# Altium PCB 30-1000.PcbDoc
Units mil, origin at the board's own origin, x right, y up, seen from the top; angles counter-clockwise.
Board outline 5157.48 x 11496.06 mil, 2 copper layers (Top Layer, Top, Bottom Layer, Bottom); 74 components, 41 nets, 177 pads, 241 vias.
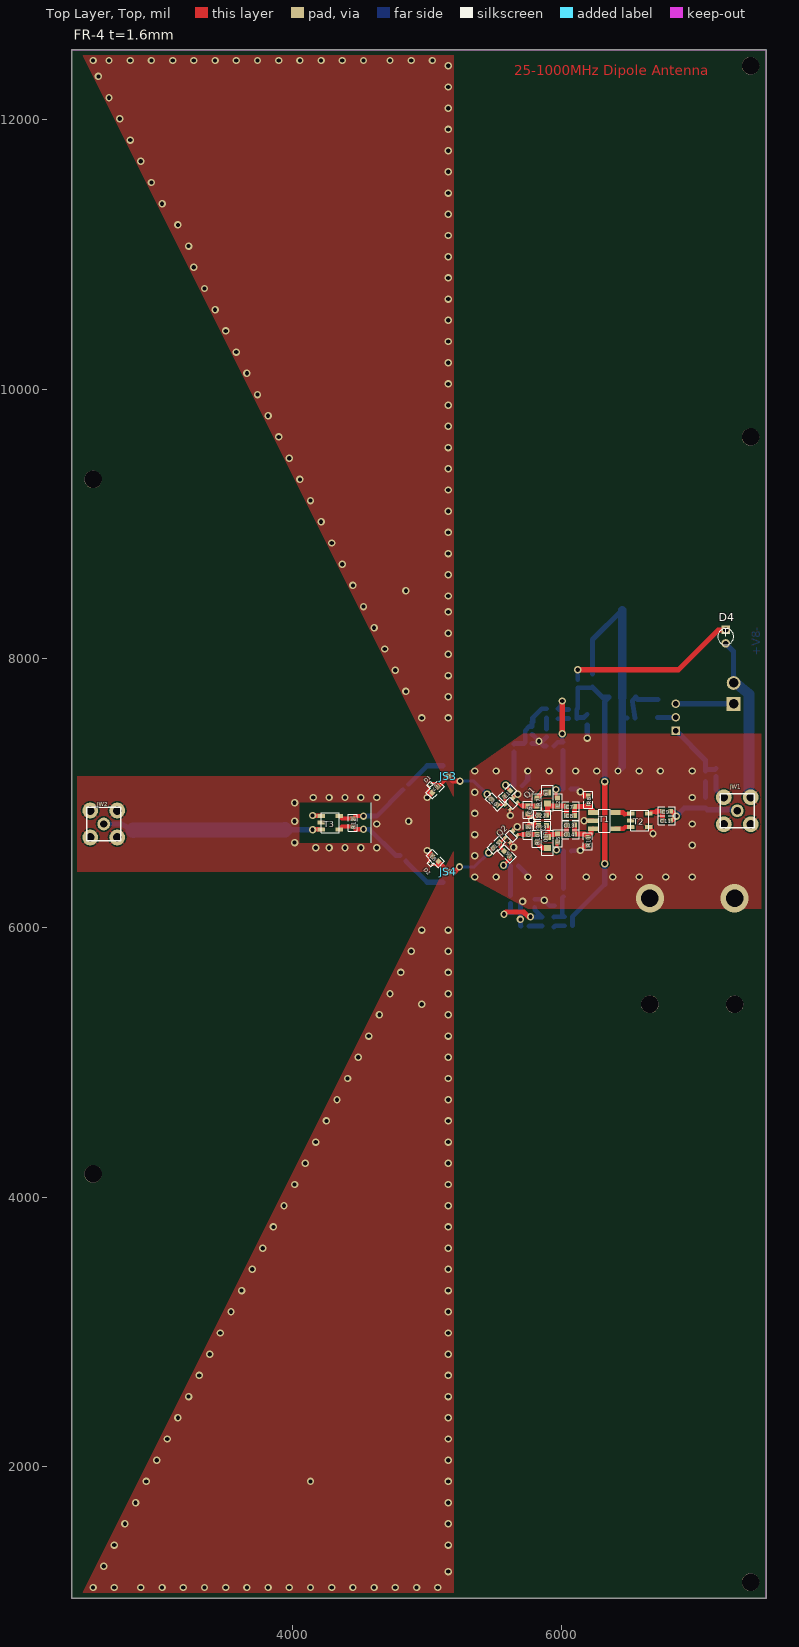
[diagram p0: Top Layer, Top view]
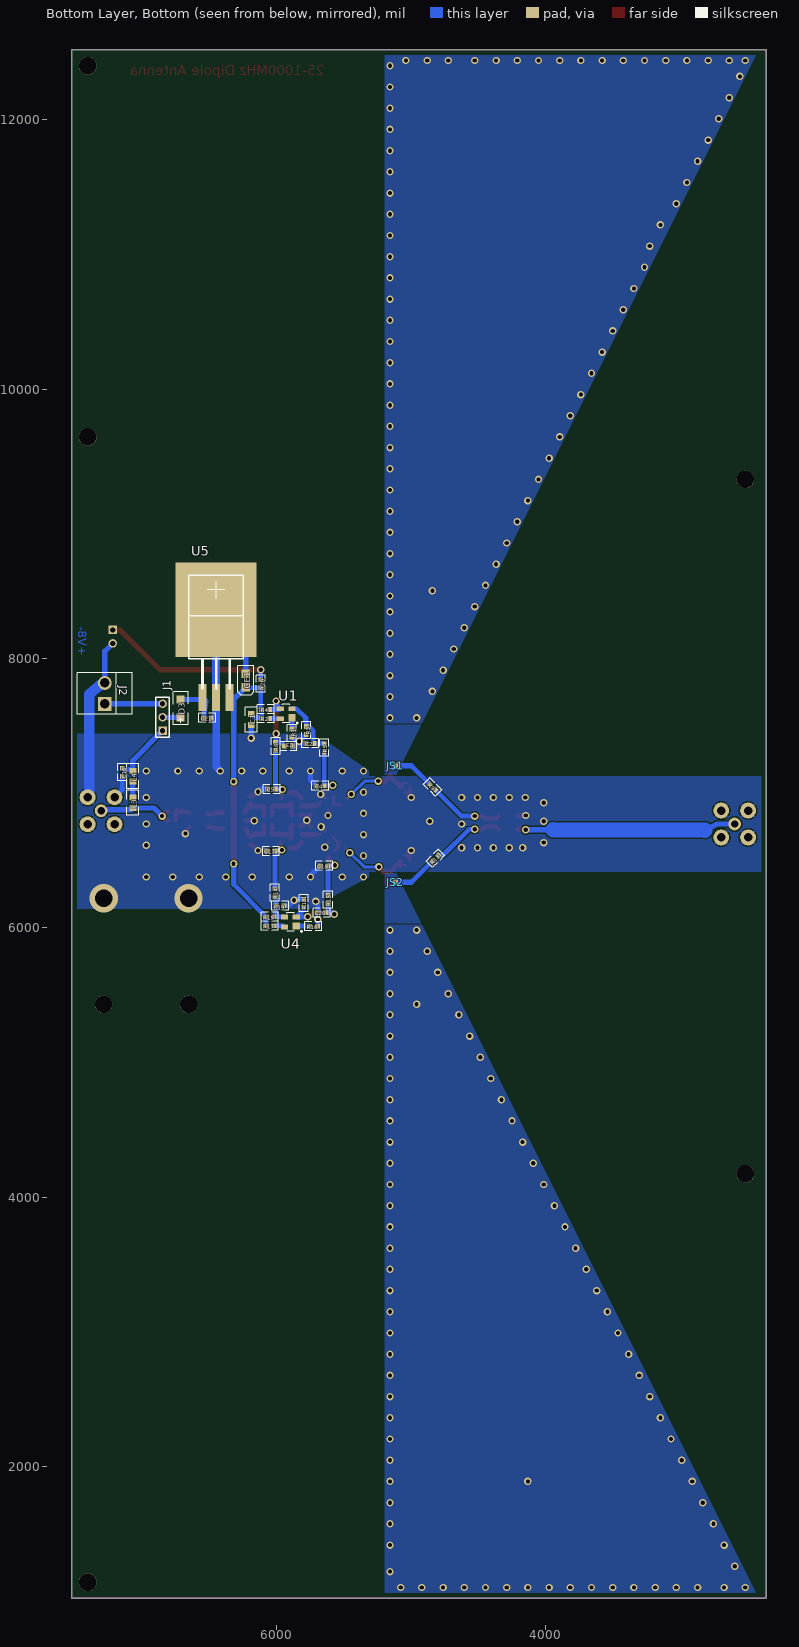
[diagram p1: Bottom Layer, Bottom view, seen from below]

## Layer stack, top to bottom
Top Solder, Top Mask: solder mask 0.4, Solder Resist, Dk 3.5
Top Layer, Top: signal copper 1.4
Dielectric 1: dielectric 12.6, FR-4, Dk 4.8
Bottom Layer, Bottom: signal copper 1.4
Bottom Solder, Bot Mask: solder mask 0.4, Solder Resist, Dk 3.5

## Board outline
2362.2,1023.62 7519.69,1023.62 7519.69,12519.68 2362.2,12519.68

## Design rules (kind name [scope] priority, off if disabled: settings)
Clearance [All] p1: gap=10 ignorepadtopadclearanceinfootprint=FALSE except(0: Arc-Hole Track-Hole SMDPad-Hole THPad-Hole Via-Hole Fill-Hole Poly-Hole Region-Hole Text-Hole; 7.87: Arc-Arc Arc-Track Arc-THPad Arc-Via Track-Track Track-THPad Track-Via THPad-THPad THPad-Via Via-Via)
PlaneClearance [All] p1: clearance=10
PolygonConnect PolygonConnect_16 [IsPolygon And InNet('GND') And OnLayer('Bottom Layer, Bottom') vs IsVia] p1: connectstyle=Direct reliefconductorwidth=15 reliefentries=4 polygonreliefangle="90 Angle" airgapwidth=10
PolygonConnect PolygonConnect_15 [IsPolygon And InNet('GND') And OnLayer('Bottom Layer, Bottom') vs IsPad] p2: connectstyle=Relief reliefconductorwidth=15 reliefentries=4 polygonreliefangle="45 Angle" airgapwidth=10
PolygonConnect PolygonConnect_14 [IsPolygon And InNet('W1') And OnLayer('Bottom Layer, Bottom') vs IsVia] p3: connectstyle=Direct reliefconductorwidth=15 reliefentries=4 polygonreliefangle="90 Angle" airgapwidth=10
PolygonConnect PolygonConnect_13 [IsPolygon And InNet('W1') And OnLayer('Bottom Layer, Bottom') vs IsPad] p4: connectstyle=Direct reliefconductorwidth=15 reliefentries=4 polygonreliefangle="90 Angle" airgapwidth=10
PolygonConnect PolygonConnect_12 [IsPolygon And InNet('W2') And OnLayer('Bottom Layer, Bottom') vs IsVia] p5: connectstyle=Direct reliefconductorwidth=15 reliefentries=4 polygonreliefangle="90 Angle" airgapwidth=10
PolygonConnect PolygonConnect_11 [IsPolygon And InNet('W2') And OnLayer('Bottom Layer, Bottom') vs IsPad] p6: connectstyle=Relief reliefconductorwidth=15 reliefentries=4 polygonreliefangle="45 Angle" airgapwidth=10
PolygonConnect PolygonConnect_10 [IsPolygon And InNet('TS1') And OnLayer('Bottom Layer, Bottom') vs IsVia] p7: connectstyle=Direct reliefconductorwidth=15 reliefentries=4 polygonreliefangle="90 Angle" airgapwidth=10
PolygonConnect PolygonConnect_9 [IsPolygon And InNet('TS1') And OnLayer('Bottom Layer, Bottom') vs IsPad] p8: connectstyle=Direct reliefconductorwidth=15 reliefentries=4 polygonreliefangle="90 Angle" airgapwidth=10
PolygonConnect PolygonConnect_8 [IsPolygon And InNet('TS2') And OnLayer('Bottom Layer, Bottom') vs IsVia] p9: connectstyle=Direct reliefconductorwidth=15 reliefentries=4 polygonreliefangle="90 Angle" airgapwidth=10
PolygonConnect PolygonConnect_7 [IsPolygon And InNet('TS2') And OnLayer('Bottom Layer, Bottom') vs IsPad] p10: connectstyle=Direct reliefconductorwidth=15 reliefentries=4 polygonreliefangle="90 Angle" airgapwidth=10
PolygonConnect PolygonConnect_6 [IsPolygon And InNet('W2') And OnLayer('Top Layer, Top') vs IsVia] p11: connectstyle=Direct reliefconductorwidth=15 reliefentries=4 polygonreliefangle="90 Angle" airgapwidth=10
PolygonConnect PolygonConnect_5 [IsPolygon And InNet('W2') And OnLayer('Top Layer, Top') vs IsPad] p12: connectstyle=Direct reliefconductorwidth=15 reliefentries=4 polygonreliefangle="90 Angle" airgapwidth=10
PolygonConnect PolygonConnect_4 [IsPolygon And InNet('W1') And OnLayer('Top Layer, Top') vs IsVia] p13: connectstyle=Direct reliefconductorwidth=15 reliefentries=4 polygonreliefangle="90 Angle" airgapwidth=10
PolygonConnect PolygonConnect_3 [IsPolygon And InNet('W1') And OnLayer('Top Layer, Top') vs IsPad] p14: connectstyle=Direct reliefconductorwidth=15 reliefentries=4 polygonreliefangle="90 Angle" airgapwidth=10
PolygonConnect PolygonConnect_2 [IsPolygon And InNet('GND') And OnLayer('Top Layer, Top') vs IsVia] p15: connectstyle=Direct reliefconductorwidth=15 reliefentries=4 polygonreliefangle="90 Angle" airgapwidth=10
PolygonConnect PolygonConnect_1 [IsPolygon And InNet('GND') And OnLayer('Top Layer, Top') vs IsPad] p16: connectstyle=Relief reliefconductorwidth=15 reliefentries=4 polygonreliefangle="45 Angle" airgapwidth=10
PolygonConnect [All] p17: connectstyle=Relief reliefconductorwidth=10 reliefentries=4 polygonreliefangle="90 Angle" airgapwidth=10
RoutingVias [All] p1: holewidth=28 width=50 viastyle="Through Hole" minholewidth=28 minwidth=50 maxholewidth=28 maxwidth=50
SolderMaskExpansion [All] p1: expansion=4
Width [All] p1: maxlimit=10 minlimit=10 preferedwidth=10
29 further rules are at their usual default settings.

## Components (designator, comment, footprint, x,y, rotation, side; value= is the part's Value field where it differs from the comment)
C1 "" SMD-0805 6188.98,7547.24 r90 bottom
C2 "" SMD-0603 5779.53,7370.08 r180 bottom
C3 "" SMD-0603 5881.89,7350.39 r0 bottom
C4 "" SMD-0603 5704.72,7055.12 r180 bottom
C5 "" SMD-0603 6066.93,7031.5 r180 bottom
C6 "" SMD-0603 5748.03,6905.51 r270 top
C7 "" SMD-0603 6035.43,6901.57 r0 top
C8 "" SMD-0603 6035.43,6834.65 r0 top
C9 "" SMD-0603 6748.03,6866.14 r0 top
C10 "" SMD-0603 5480.31,6956.69 r315 top
C11 "" SMD-0603 6748.03,6799.21 r0 top
C12 "" SMD-0603 5748.03,6692.91 r90 top
C13 "" SMD-0603 6035.43,6763.78 r0 top
C14 "" SMD-0603 6035.43,6696.85 r0 top
C15 "" SMD-0603 5492.13,6594.49 r45 top
C16 "" SMD-0603 7145.67,7185.04 r270 bottom
C17 "" SMD-0603 6070.87,6570.87 r180 bottom
C18 "" SMD-0603 5677.17,6460.63 r180 bottom
C19 "" SMD-0603 5944.88,6165.35 r0 bottom
C20 "" SMD-0603 5692.91,6114.17 r180 bottom
C21 "" SMD-0603 6543.31,7559.06 r180 bottom
C22 "" SMD-0603 5826.77,6838.58 r0 top
C23 "" SMD-0603 5885.83,6759.84 r180 top
CE1 "" SMD-A 6228.35,7787.4 r90 bottom
D1 "" TSLP-2-17 5031.5,7074.8 r225 top
D2 "" TSLP-2-17 5011.81,6488.19 r315 top
D3 "" SOD80C 6712.6,7629.92 r90 bottom
D4 "" LED3MM 7216.54,8212.6 r270 top
J1 "" PLS-3 6846.46,7464.57 r90 bottom
J2 "" PWL-2 7275.59,7818.9 r0 bottom
JS1 "" PAD1X1MM 5118.11,7204.72 r90 bottom
JS2 "" PAD1X1MM 5118.11,6338.58 r90 bottom
JS3 "" PAD1X1MM 5157.48,7125.98 r90 top
JS4 "" PAD1X1MM 5157.48,6417.32 r90 top
JW1 "" SMA-V 7303.15,6870.08 r90 top
JW2 "" SMA-V 2598.43,6771.65 r90 top
L1 "" SMD-0603 5574.8,6976.38 r45 top
L2 "" SMD-0603 5968.5,6905.51 r90 top
L3 "" SMD-0805 7066.93,6929.13 r270 bottom
L4 "" SMD-0805 7066.93,7125.98 r270 bottom
L5 "" SMD-0603 5968.5,6637.8 r90 top
L6 "" SMD-0603 5614.17,6527.56 r135 top
L7 "" SMD-0603 5078.74,7047.24 r225 top
L8 "" SMD-0603 5039.37,6535.43 r315 top
L9 "" SMD-0805 5893.7,6964.57 r90 top
L10 "" SMD-0805 5893.7,6633.86 r90 top
Q1 "" SOT-343 5637.8,6964.57 r45 top
Q2 "" SOT-343 5637.8,6720.47 r45 top
R1 "" SMD-0603 5885.83,7476.38 r270 bottom
R2 "" SMD-0603 6110.24,7555.12 r180 bottom
R3 "" SMD-0603 5779.53,7496.06 r270 bottom
R4 "" SMD-0603 6110.24,7622.05 r180 bottom
R5 "" SMD-0603 5645.67,7307.09 r90 bottom
R6 "" SMD-0603 6007.87,7318.9 r90 bottom
R7 "" SMD-0603 5814.96,6964.57 r270 top
R8 "" SMD-0603 6196.85,6921.26 r90 top
R9 "" SMD-0603 4862.2,7066.93 r225 bottom
R10 "" SMD-0603 5814.96,6633.86 r90 top
R11 "" SMD-0603 6192.91,6614.17 r90 top
R12 "" SMD-0603 4448.82,6751.97 r90 top
R13 "" SMD-0603 4842.52,6496.06 r135 bottom
R14 "" SMD-0603 6011.81,6232.28 r90 bottom
R15 "" SMD-0603 5618.11,6181.1 r90 bottom
R16 "" SMD-0603 5755.91,6011.81 r180 bottom
R17 "" SMD-0603 6078.74,6015.75 r180 bottom
R18 "" SMD-0603 5799.21,6153.54 r90 bottom
R19 "" SMD-0603 6078.74,6082.68 r180 bottom
R20 "" SMD-0603 6118.11,7842.52 r270 bottom
T1 "" SM-138 6232.28,6736.22 r90 top
T2 "" SM-22 6511.81,6748.03 r90 top
T3 "" SM-22 4212.6,6732.28 r90 top
U1 "" SOT143 5929.13,7590.55 r90 bottom
U4 "" SOT143 5897.64,6043.31 r90 bottom
U5 "" TO-220-SMD 6448.82,8511.81 r180 bottom

## Footprints (in the part's own frame and the unit in brackets; to place one, negate y for a bottom-side part, rotate by r counter-clockwise, add the part's x,y. Pads: shape width x height; smd on the part's side, far side on the other; paste and mask are expansions set on the pad)
LED3MM [mm]
  rect 1.6x1.6 hole 1: 1(0,0)
  round 1.6 hole 1: 2(2.54,0)
  silkscreen extent -0.25,-1.52 2.79,1.52
PAD1X1MM [mm]
  rect 1x1 smd: 1(0,0)
PLS-3 [mm]
  rect 1.6x1.6 hole 1: 1(0,0)
  round 1.6 hole 1: 2(2.54,0) 3(5.08,0)
  silkscreen extent -1.27,-1.27 6.35,1.27
PWL-2 [mm]
  rect 2.6x2.6 hole 1.8: 1(0,3.96)
  round 2.6 hole 1.8: 2(0,0)
  silkscreen extent -5.2,-1.9 5.2,5.9
SM-22 [mm]
  rect 0.76x1.4 smd: 1(0,0) 2(1.27,0) 3(2.54,0) 4(2.54,-3.43) 5(0,-3.43)
  silkscreen extent -0.65,-3.4 3.15,0
SM-138 [mil]
  rect 36x75 smd: 1(0,0) 2(60,0) 3(120,0) 4(120,-166) 5(0,-166)
  silkscreen extent -24,-123 144,-43
SMA-V [mm]
  round 2.4 hole 1.4: 1(0,0)
  round 3 hole 1.6: 2(-2.54,-2.54) 3(2.54,-2.54) 4(2.54,2.54) 5(-2.54,2.54)
  silkscreen extent -3.18,-3.18 3.18,3.18
SMD-0603 [mm]
  rect 0.9x0.9 smd: 1(0,0) 2(1.5,0)
  silkscreen extent -0.85,-0.85 2.35,0.85
SMD-0805 [mil]
  rect 45x50 smd: 1(-40,0) 2(40,0)
  silkscreen extent -93,-44 93,44
SMD-A [mil]
  rect 65x65 smd: 1(0,0) 2(100,0)
  silkscreen extent -60,-60 160,60
SOD80C [mil]
  rect 60x60 smd: 1(-66.93,0) 2(66.93,0)
  silkscreen extent -122,-55 122,55
SOT143 [mm]
  rect 1.35x1.35 smd: 1(-0.75,-1.1)
  rect 0.9x1.35 smd: 2(0.95,-1.1) 3(0.95,1.1) 4(-0.95,1.1)
  silkscreen extent -1.87,-2.22 1.75,0.7
SOT-343 [mm]
  rect 0.65x0.55 smd: 1(-1.95,0.15) 2(-1.95,-1.15) 3(0,-1.15)
  rect 0.65x0.85 smd: 4(0,0)
  silkscreen extent -1.55,-1.5 -0.35,0.5
TO-220-SMD [mil]
  rect 60x200 smd: 1(-100,-800) 2(0,-800) 3(100,-800)
  rect 600x700 smd: 4(0,-150)
  silkscreen extent -202,-737 202,105
TSLP-2-17 [mm]
  rect 0.4x0.4 smd: 1(0,0) 2(0.8,0)
  silkscreen extent -0.1,-0.35 0.9,0.35

## Free pads (board coordinates)
  round 129.92 hole 129.92 unplated: 0(2519.68,4173.23) 0(2519.68,9330.71) 0(6653.54,5433.07) 0(7283.46,5433.07) 0(7401.57,1141.73) 0(7401.57,9645.67) 0(7401.57,12401.57)

## Via types
v1: diameter 55.12, hole 31.5, Top Layer, Top to Bottom Layer, Bottom, 239 vias
v2: diameter 208.66, hole 129.92, Top Layer, Top to Bottom Layer, Bottom, 2 vias

## Nets (pads, with @x,y where several pads share a name; then routed paths per layer and width w, separated by ;. In a path a pad name is that pad's centre, name@x,y a point inside that pad or via, vN(x,y) a via of type N, cw(c..) or ccw(c..) an arc to the next point about the centre after c; other vN are vias at no path point)
+5V: C1.2 CE1.1 R2.1 R4.1 R17.1 R19.1 R20.2 U5.3 | length 2395.2
  Top Layer, Top w39.37: v1(6318.9,6476.38) v1(6318.9,7086.61)
  Bottom Layer, Bottom w35.43: R17.1 R19.1 6318.9,6322.83 ; C1.2 6164.72,7562.99 6118.11,7562.99 R2.1 R4.1 6118.11,7629.92 R20.2 6224.41,7783.46 CE1.1
  Bottom Layer, Bottom w39.37: CE1.1 6303.94,7711.81 U5.3 6318.9,7681.89 v1(6318.9,7086.61) ; 6318.9,6322.83 v1(6318.9,6476.38)
+VIN: J1.3 J2.1 | length 429.8
  Bottom Layer, Bottom w39.37: J1.3 7274.02,7664.57 J2.1
GND: C1.1 C2.1 C3.1 C4.1 C5.1 C6.2 C12.2 C16.2 C17.1 C18.1 C19.1 C20.1 C21.2 C22.1 C23.2 CE1.2 D1.2 D2.1 D4.2 J2.2 JW1.2 JW1.3 JW1.4 JW1.5 JW2.2 JW2.3 JW2.4 JW2.5 L7.2 L8.1 Q1.2 Q1.4 Q2.2 Q2.4 R1.2 R3.2 R8.2 R11.1 R16.2 R18.2 T1.2 T2.5 T3.3 U5.2 U5.4 | length 5346.8
  Top Layer, Top w15.75: 5009.23,7006.52 D1.2 ; D2.1 5011.81,6535.43
  Top Layer, Top w21.65: Q2.2 v1@5641.73,6607.96 ; v1@5615.52,6837.23 Q1.2
  Top Layer, Top w23.62: v1(4149.61,6834.65) v1@4151.97,6832.28 ; v1@5615.52,6837.23 v1(5618.11,6834.65) ; Q2.4 v1(5669.29,6751.97) ; Q1.4 5649.61,6976.38 v1(5673.23,6992.13) ; v1(5641.73,6598.43) v1@5641.73,6607.96
  Top Layer, Top w29.92: T2.5 6677.17,6717.72 v1(6677.17,6700.79)
  Top Layer, Top w31.5: v1@4151.97,6832.28 T3.3
  Top Layer, Top w35.43: v1(5000,6574.8) 5025.59,6549.21 L8.1 ; v1(5000,6968.5) 5023.62,6992.13 L7.2 ; C12.2 v1(5775.59,6799.21) ; C6.2 v1(5775.59,6799.21) ; C23.2 5799.21,6759.84 v1(5775.59,6799.21) ; C22.1 5799.21,6838.58 v1(5775.59,6799.21) ; v1(6137.8,6574.8) 6177.17,6614.17 R11.1 ; v1(6137.8,7011.81) 6169.29,6980.31 R8.2
  Top Layer, Top w36: v1@6166.3,6796.22 T1.2
  Top Layer, Top w39.37: 5009.23,7006.52 5023.62,6992.13 ; 5011.81,6535.43 5025.59,6549.21 ; v1(6165.35,6795.28) v1@6166.3,6796.22
  Bottom Layer, Bottom w35.43: C18.1 v1@5748.03,6389.76 ; v1@5692.91,6181.1 C20.1 v1(5692.91,6062.99) 5692.91,6015.75 R16.2 ; C4.1 5748.03,7098.43 ; C2.1 5814.96,7370.08 v1(5830.71,7385.83) ; R3.2 v1(5830.71,7385.83) ; R18.2 v1@5862.2,6212.6 ; v1(5870.08,6204.72) 5909.45,6165.35 C19.1 ; C3.1 5866.14,7350.39 v1(5830.71,7385.83) ; R1.2 5854.33,7385.83 v1(5830.71,7385.83) ; C5.1 6118.11,7031.5 ; C17.1 v1@6133.86,6578.74 ; 6448.82,7574.8 C21.2 ; 7145.67,7027.56 C16.2
  Bottom Layer, Bottom w39.37: v1@5692.91,6181.1 v1(5708.66,6196.85) ; v1(5748.03,6377.95) v1@5748.03,6389.76 ; 5748.03,7098.43 v1(5748.03,7165.35) ; v1@5862.2,6212.6 v1(5870.08,6204.72) ; 6118.11,7031.5 v1(6137.8,7011.81) ; v1@6133.86,6578.74 v1(6137.8,6574.8) ; v1(6188.98,7409.45) C1.1 ; CE1.2 6228.35,8141.34 U5.4 ; 7145.67,7027.56 JW1.4 ; D4.2 7275.59,8053.54 J2.2
  Bottom Layer, Bottom w55.12: v1(6417.32,7165.35) 6448.82,7196.85 6448.82,7574.8 U5.2
  Bottom Layer, Bottom w60: U5.2 U5.4
  Bottom Layer, Bottom w78.74: J2.2 7291.34,7818.9 7389.76,7736.22 7389.76,6999.21 JW1.3
  other v1: 5354.33,6377.95 5511.81,6377.95 5905.51,6377.95 6181.1,6377.95 6377.95,6377.95 6574.8,6377.95 6771.65,6377.95 6968.5,6377.95 5354.33,6535.43 4173.23,6594.49 4271.65,6594.49 4389.76,6594.49 4507.87,6594.49 4625.98,6594.49 6968.5,6614.17 4015.75,6633.86 5354.33,6692.91 4625.98,6771.65 6968.5,6771.65 4015.75,6791.34 4862.2,6791.34 5354.33,6850.39 4015.75,6929.13 4153.54,6968.5 4271.65,6968.5 4389.76,6968.5 4507.87,6968.5 4625.98,6968.5 6968.5,6968.5 5354.33,7007.87 5354.33,7165.35 5511.81,7165.35 5905.51,7165.35 6102.36,7165.35 6259.84,7165.35 6574.8,7165.35 6732.28,7165.35 6968.5,7165.35
  other v2: 6653.54,6220.47 7283.46,6220.47
N045200: D4.1 R20.1 | length 1295.5
  Top Layer, Top w39.37: v1(6118.11,7917.32) 6866.14,7917.32 7161.42,8212.6 D4.1
  Bottom Layer, Bottom w35.43: R20.1 v1(6118.11,7917.32)
N3475576: C9.1 C11.1 T2.4 | length 175.6
  Top Layer, Top w29.92: T2.4 6661.02,6862.2 6700.79,6862.2
  Top Layer, Top w35.43: 6704.72,6866.14 C9.1 C11.1
  Top Layer, Top w39.37: 6700.79,6862.2 6704.72,6866.14
N3475764: C16.1 J1.1 L4.1 | length 476.5
  Bottom Layer, Bottom w35.43: L4.1 7078.11,7177.17 7137.8,7177.17 C16.1
  Bottom Layer, Bottom w39.37: J1.1 7066.93,7244.09 L4.1
N3478305: D3.1 J1.2 | length 134.5
  Bottom Layer, Bottom w39.37: D3.1 6844.88,7562.99 J1.2
N3478433: C21.1 D3.2 U5.1 | length 334.7
  Bottom Layer, Bottom w35.43: C21.1 6523.62,7686.61 U5.1
  Bottom Layer, Bottom w39.37: U5.1 6563.78,7696.85 D3.2
N3479247: T1.5 T2.1 | length 118.4
  Top Layer, Top w29.92: 6456.69,6736.22 6468.5,6748.03 T2.1
  Top Layer, Top w36: T1.5 6456.69,6736.22
N3479295: T1.4 T2.3 | length 118.2
  Top Layer, Top w29.92: 6464.57,6846.46 6510.24,6846.46 T2.3
  Top Layer, Top w36: T1.4 6454.8,6856.22 6464.57,6846.46
N3479651: C13.2 C14.2 R11.2 T1.1 | length 254.4
  Top Layer, Top w35.43: C13.2 C14.2 6169.29,6696.85 R11.2 6192.91,6677.17 6216.54,6700.79
  Top Layer, Top w36: 6216.54,6700.79 6216.54,6720.47 T1.1
N3479714: C7.2 C8.2 R8.1 T1.3 | length 257.2
  Top Layer, Top w35.43: C8.2 C7.2 6177.17,6901.57 R8.1 6212.6,6905.51 6212.6,6889.76
  Top Layer, Top w36: 6212.6,6889.76 6232.28,6870.08 T1.3
N3479872: L9.2 R7.1 | length 95.3
  Top Layer, Top w35.43: R7.1 5854.96,7004.57
  Top Layer, Top w39.37: 5854.96,7004.57 L9.2
N3479906: L10.1 R10.1 | length 95.3
  Top Layer, Top w35.43: R10.1 5854.96,6593.86
  Top Layer, Top w39.37: 5854.96,6593.86 L10.1
N3481012: R2.2 U1.4 | length 79.6
  Bottom Layer, Bottom w35.43: U1.4 6013.78,7553.15 6015.75,7555.12 R2.2
N3481043: C3.2 R4.2 R6.2 U1.3 | length 538.4
  Top Layer, Top w39.37: v1(6003.94,7440.94) v1(6003.94,7685.04)
  Bottom Layer, Bottom w35.43: C3.2 5968.5,7377.95 R6.2 6003.94,7381.89 v1(6003.94,7440.94) ; v1(6003.94,7685.04) 6003.94,7659.45 U1.3 5978.35,7622.05 R4.2
N3481716: C6.1 Q1.3 R7.2 | length 156.4
  Top Layer, Top w21.65: Q1.3 5692.91,6909.45 5708.66,6909.45
  Top Layer, Top w35.43: 5712.6,6905.51 C6.1 R7.2
  Top Layer, Top w39.37: 5708.66,6909.45 5712.6,6905.51
N3481787: C5.2 L2.2 R6.1 | length 415
  Top Layer, Top w23.62: v1(5956.69,7027.56) 5956.69,6964.57 L2.2
  Bottom Layer, Bottom w35.43: v1@5960.63,7031.5 C5.2 R6.1
  Bottom Layer, Bottom w39.37: v1(5956.69,7027.56) v1@5960.63,7031.5
N3482265: R1.1 U1.1 | length 84.6
  Bottom Layer, Bottom w35.43: R1.1 U1.1
N3482296: C2.2 R3.1 R5.2 U1.2 | length 433.9
  Bottom Layer, Bottom w35.43: R5.2 5649.61,7370.08 C2.2 5728.35,7377.95 5728.35,7464.57 5759.84,7496.06 R3.1 5779.53,7527.56 ; 5783.46,7559.06 5852.36,7627.95 U1.2
  Bottom Layer, Bottom w39.37: 5779.53,7527.56 5783.46,7531.5 5783.46,7559.06
N3482928: C4.2 L1.2 R5.1 | length 371.5
  Top Layer, Top w23.62: v1(5582.68,7059.06) 5582.68,7052.02 L1.2
  Bottom Layer, Bottom w35.43: v1(5582.68,7059.06) 5641.73,7059.06 C4.2 R5.1
N3483281: C10.2 L1.1 Q1.1 | length 121.3
  Top Layer, Top w21.65: C10.2 5522.55,6914.46 Q1.1 L1.1@5579.33,6971.85
  Top Layer, Top w23.62: L1.1 L1.1@5579.33,6971.85
N3483509: R16.1 U4.1 | length 99.2
  Bottom Layer, Bottom w35.43: R16.1 5757.87,6013.78 U4.1
N3483555: R17.2 U4.4 | length 82.8
  Bottom Layer, Bottom w35.43: U4.4 5950.79,6015.75 R17.2
N3483586: C19.2 R14.1 R19.2 U4.3 | length 238.9
  Bottom Layer, Bottom w35.43: U4.3 5942.91,6082.68 R19.2 6003.94,6098.43 C19.2 6003.94,6224.41 R14.1
N3484398: C12.1 Q2.3 R10.2 | length 147
  Top Layer, Top w21.65: Q2.3 5674.27,6692.91 5708.66,6692.91
  Top Layer, Top w35.43: 5708.66,6692.91 C12.1 R10.2
N3484494: C17.2 L5.1 R14.2 | length 390.9
  Top Layer, Top w23.62: v1(5960.63,6578.74) L5.1
  Bottom Layer, Bottom w35.43: v1(5960.63,6578.74) C17.2 R14.2
N3485191: C20.2 R15.1 R18.1 U4.2 | length 542.5
  Top Layer, Top w39.37: v1(5570.87,6102.36) 5586.61,6118.11 5716.54,6118.11 5751.97,6082.68 v1(5767.72,6082.68)
  Bottom Layer, Bottom w35.43: v1@5582.68,6114.17 C20.2 5618.11,6129.92 R15.1 ; v1@5769.69,6080.71 U4.2 5799.21,6135.83 R18.1
  Bottom Layer, Bottom w39.37: v1(5570.87,6102.36) v1@5582.68,6114.17 ; v1(5767.72,6082.68) v1@5769.69,6080.71
N3485389: C18.2 L6.1 R15.2 | length 355.8
  Top Layer, Top w23.62: v1(5566.93,6464.57) L6.1@5614.17,6511.81
  Top Layer, Top w35.43: L6.1@5614.17,6511.81 L6.1
  Bottom Layer, Bottom w35.43: v1@5570.87,6460.63 C18.2 R15.2
  Bottom Layer, Bottom w39.37: v1(5566.93,6464.57) v1@5570.87,6460.63
N3485480: C15.2 L6.2 Q2.1 | length 142.5
  Top Layer, Top w21.65: C15.2 5545.22,6636.25 Q2.1
  Top Layer, Top w23.62: C15.2 5543.31,6626.82 5543.31,6598.43 L6.2
N3826481: R9.2 R12.2 T3.4 | length 570.3
  Top Layer, Top w29.92: T3.4 4368.9,6811.02 R12.2
  Top Layer, Top w31.5: R12.2 4468.5,6830.71 v1(4527.56,6830.71)
  Bottom Layer, Bottom w35.43: v1(4527.56,6830.71) 4625.98,6830.71 R9.2
N3826523: R12.1 R13.2 T3.5 | length 550
  Top Layer, Top w29.92: T3.5 4367.32,6751.97 R12.1
  Top Layer, Top w31.5: R12.1 4468.5,6732.28 v1(4527.56,6732.28)
  Bottom Layer, Bottom w35.43: v1(4527.56,6732.28) 4570.87,6732.28 4765.33,6537.82 R13.2
N3827877: L3.1 L4.2 | length 116.9
  Bottom Layer, Bottom w39.37: L3.1 L4.2
NET00000: C7.1 C8.1 C22.2 L2.1 L9.1 | length 306.4
  Top Layer, Top w35.43: C22.2 5893.7,6846.46 L9.1 5912.76,6905.51 L2.1 6023.62,6905.51 C7.1 C8.1
NET00001: C13.1 C14.1 C23.1 L5.2 L10.2 | length 298.5
  Top Layer, Top w35.43: C23.1 5893.7,6751.97 5893.7,6692.91 5956.69,6692.91 L5.2 C14.1 C13.1
  Top Layer, Top w39.37: L10.2 L10.2@5893.7,6692.91
OUT: C9.2 C11.2 JW1.1 L3.2 | length 599.2
  Top Layer, Top w35.43: C11.2 6818.9,6799.21 v1(6850.39,6830.71) 6814.96,6866.14 C9.2
  Bottom Layer, Bottom w39.37: v1(6850.39,6830.71) 6908.82,6889.13 7019.69,6889.76 L3.2 7078.11,6877.95 7295.28,6877.95 JW1.1
TS: JW2.1 T3.1 | length 1627.4
  Top Layer, Top w23.62: v1(4149.61,6728.35) v1@4153.54,6732.28
  Top Layer, Top w31.5: v1@4153.54,6732.28 T3.1
  Bottom Layer, Bottom w39.37: JW2.1 2728.35,6771.65 2818.9,6724.41 ; 3944.88,6728.35 v1(4149.61,6728.35)
  Bottom Layer, Bottom w114.17: 2818.9,6724.41 3944.88,6728.35
TS1: JS1.1 R9.1 | length 313
  Bottom Layer, Bottom w35.43: R9.1 5000,7204.72
  Bottom Layer, Bottom w39.37: 5000,7204.72 JS1.1
TS2: JS2.1 R13.1 | length 340.8
  Bottom Layer, Bottom w35.43: R13.1 5000,6338.58
  Bottom Layer, Bottom w39.37: 5000,6338.58 JS2.1
W1: C10.1 D1.1 JS3.1 L7.1 | length 565.3
  Top Layer, Top w15.75: D1.1 5055.12,7074.8 5066.93,7062.99
  Top Layer, Top w23.62: v1(5444.88,6992.13) C10.1
  Top Layer, Top w35.43: 5066.93,7062.99 5066.93,7059.06 L7.1 JS3.1
  Top Layer, Top w39.37: JS3.1 5192.91,7090.55 v1(5244.09,7090.55)
  Bottom Layer, Bottom w23.62: v1(5244.09,7090.55) 5346.46,7090.55 v1(5444.88,6992.13)
  other v1: 4960.63,7559.06 5157.48,7559.06 5157.48,7716.54 4842.52,7755.91 5157.48,7874.02 4763.78,7913.39 5157.48,8031.5 4685.04,8070.87 5157.48,8188.98 4606.3,8228.35 5157.48,8346.46 4527.56,8385.83 5157.48,8464.57 4842.52,8503.94 4448.82,8543.31 5157.48,8622.05 4370.08,8700.79 5157.48,8779.53 4291.34,8858.27 5157.48,8937.01 4212.6,9015.75 5157.48,9094.49 4133.86,9173.23 5157.48,9251.97 4055.12,9330.71 5157.48,9409.45 3976.38,9488.19 5157.48,9566.93 3897.64,9645.67 5157.48,9724.41 3818.9,9803.15 5157.48,9881.89 3740.16,9960.63 5157.48,10039.37 3661.42,10118.11 5157.48,10196.85 3582.68,10275.59 5157.48,10354.33 3503.94,10433.07 5157.48,10511.81 3425.2,10590.55 5157.48,10669.29 3346.46,10748.03 5157.48,10826.77 3267.72,10905.51 5157.48,10984.25 3228.35,11062.99 5157.48,11141.73 3149.61,11220.47 5157.48,11299.21 3031.5,11377.95 5157.48,11456.69 2952.76,11535.43 5157.48,11614.17 2874.02,11692.91 5157.48,11771.65 2795.28,11850.39 5157.48,11929.13 2716.54,12007.87 5157.48,12086.61 2637.8,12165.35 5157.48,12244.09 2559.06,12322.83 5157.48,12401.57 2519.68,12440.94 2637.8,12440.94 2795.28,12440.94 2952.76,12440.94 3110.24,12440.94 3267.72,12440.94 3425.2,12440.94 3582.68,12440.94 3740.16,12440.94 3897.64,12440.94 4055.12,12440.94 4212.6,12440.94 4370.08,12440.94 4527.56,12440.94 4724.41,12440.94 4881.89,12440.94 5039.37,12440.94
W2: C15.1 D2.2 JS4.1 L8.2 | length 582.4
  Top Layer, Top w15.75: D2.2 5080.09,6465.92
  Top Layer, Top w23.62: v1(5456.69,6559.06) C15.1
  Top Layer, Top w35.43: L8.2 5094.49,6480.31 JS4.1
  Top Layer, Top w39.37: 5080.09,6465.92 5094.49,6480.31 ; JS4.1 5204.72,6417.32 v1(5240.16,6452.76)
  Bottom Layer, Bottom w23.62: v1(5240.16,6452.76) 5350.39,6452.76 v1(5456.69,6559.06)
  other v1: 2519.68,1102.36 2677.17,1102.36 2874.02,1102.36 3031.5,1102.36 3188.98,1102.36 3346.46,1102.36 3503.94,1102.36 3661.42,1102.36 3818.9,1102.36 3976.38,1102.36 4133.86,1102.36 4291.34,1102.36 4448.82,1102.36 4606.3,1102.36 4763.78,1102.36 4921.26,1102.36 5078.74,1102.36 5157.48,1220.47 2598.43,1259.84 2677.17,1417.32 5157.48,1417.32 2755.91,1574.8 5157.48,1574.8 2834.65,1732.28 5157.48,1732.28 2913.39,1889.76 4133.86,1889.76 5157.48,1889.76 2992.13,2047.24 5157.48,2047.24 3070.87,2204.72 5157.48,2204.72 3149.61,2362.2 5157.48,2362.2 3228.35,2519.68 5157.48,2519.68 3307.09,2677.17 5157.48,2677.17 3385.83,2834.65 5157.48,2834.65 3464.57,2992.13 5157.48,2992.13 3543.31,3149.61 5157.48,3149.61 3622.05,3307.09 5157.48,3307.09 3700.79,3464.57 5157.48,3464.57 3779.53,3622.05 5157.48,3622.05 3858.27,3779.53 5157.48,3779.53 3937.01,3937.01 5157.48,3937.01 4015.75,4094.49 5157.48,4094.49 4094.49,4251.97 5157.48,4251.97 4173.23,4409.45 5157.48,4409.45 4251.97,4566.93 5157.48,4566.93 4330.71,4724.41 5157.48,4724.41 4409.45,4881.89 5157.48,4881.89 4488.19,5039.37 5157.48,5039.37 4566.93,5196.85 5157.48,5196.85 4645.67,5354.33 5157.48,5354.33 4960.63,5433.07 4724.41,5511.81 5157.48,5511.81 4803.15,5669.29 5157.48,5669.29 4881.89,5826.77 5157.48,5826.77 4960.63,5984.25 5157.48,5984.25
pads on no net: T2.2 T3.2

## Polygon pours and split planes (outlines as drawn)
GND on Top Layer, Top "Top Layer, Top-GND 1" (solid, pour order 6): 5314.96,6377.95 5748.03,6141.73 7480.31,6141.73 7480.31,7440.94 5708.66,7440.94 5314.96,7165.35
W2 on Top Layer, Top "Top Layer, Top-W2" (solid, pour order 4): 2440.94,1062.99 5196.85,1062.99 5196.85,6574.8
W1 on Top Layer, Top "Top Layer, Top-W1" (solid, pour order 2): 5196.85,6968.5 5196.85,12480.32 2440.94,12480.32
GND on Top Layer, Top "Top Layer, Top-GND" (solid, pour order 0): 5019.69,6417.32 5019.69,7125.98 2401.57,7125.98 2401.57,6417.32
GND on Bottom Layer, Bottom "Bottom Layer, Bottom-GND 1" (solid, pour order 18): 7480.31,6141.73 7480.31,7440.94 5708.66,7440.94 5314.96,7165.35 5314.96,6377.95 5748.03,6141.73
GND on Bottom Layer, Bottom "Bottom Layer, Bottom-GND" (solid, pour order 16): 5629.92,6417.32 5629.92,7125.98 2401.57,7125.98 2401.57,6417.32
W1 on Bottom Layer, Bottom "Bottom Layer, Bottom-W1" (solid, pour order 14): 4921.26,7519.69 5196.85,7519.69 5196.85,12480.32 2440.94,12480.32
W2 on Bottom Layer, Bottom "Bottom Layer, Bottom-W2" (solid, pour order 12): 2440.94,1062.99 5196.85,1062.99 5196.85,6023.62 4921.26,6023.62
TS1 on Bottom Layer, Bottom "Bottom Layer, Bottom-TS1" (solid, pour order 10): 5196.85,6968.5 5196.85,7519.69 4921.26,7519.69
TS2 on Bottom Layer, Bottom "Bottom Layer, Bottom-TS2" (solid, pour order 8): 4921.26,6023.62 5196.85,6023.62 5196.85,6574.8

## Keep-outs
Keep-Out Layer, Board:
  lines w5: 2362.2,1023.62 2362.2,12519.68 7519.69,12519.68 7519.69,1023.62 2362.2,1023.62
  lines w7.87: 2362.2,1023.62 7519.69,1023.62 7519.69,12519.68 2362.2,12519.68 2362.2,1023.62

## Other copper
Top Layer, Top:
  pour cut-out: 4586.61,6633.86 4586.61,6929.13 4055.12,6929.13 4055.12,6633.86
  pour cut-out: 6456.69,6751.97 6476.38,6771.65 6476.38,6811.02 6437.01,6830.71 6338.58,6830.71 6338.58,6751.97
  text "25-1000MHz Dipole Antenna" at 5645.67,12307.09 h125
Bottom Layer, Bottom:
  text "-8V+" at 7472.44,8236.22 h62.5 r90

## Silkscreen, mask and mechanical layers (free items; w line width, h text height)
Top Overlay, Top Silk:
  lines w7.87: 4586.61,6633.86 4586.61,6929.13
  text "FR-4 t=1.6mm" at 2374.02,12594.49 h73.82
Top Solder, Top Mask:
  region: 6968.5,7125.98 6968.5,7204.72 5314.96,7204.72 5314.96,7125.98
  region: 6968.5,6338.58 6968.5,6417.32 5314.96,6417.32 5314.96,6338.58
  region: 4055.12,6555.12 4586.61,6555.12 4586.61,6633.86 4055.12,6633.86
  region: 4055.12,6929.13 4586.61,6929.13 4586.61,7007.87 4055.12,7007.87
  region: 7007.87,6377.95 7007.87,7165.35 6929.13,7165.35 6929.13,6377.95
  region: 5393.7,6377.95 5393.7,7165.35 5314.96,7165.35 5314.96,6377.95
  region: 4586.61,6555.12 4665.35,6555.12 4665.35,7007.87 4586.61,7007.87
  region: 3976.38,6555.12 4055.12,6555.12 4055.12,7007.87 3976.38,7007.87
Mechanical 3, MECH:
  lines w7.87: 5354.33,6377.95 6968.5,6377.95 6968.5,7165.35 5354.33,7165.35 5354.33,6377.95